# Altium PCB cereal-pcb.PcbDoc (part 2 of 2)
Units mil, origin at the board's own origin, x right, y up, seen from the top; angles counter-clockwise.
Board outline 894.17 x 955.43 mil, 4 copper layers (Top Layer, Signal Layer 1, Signal Layer 2, Bottom Layer), stack 22.048 mil thick; 42 components, 42 nets, 225 pads, 75 vias.
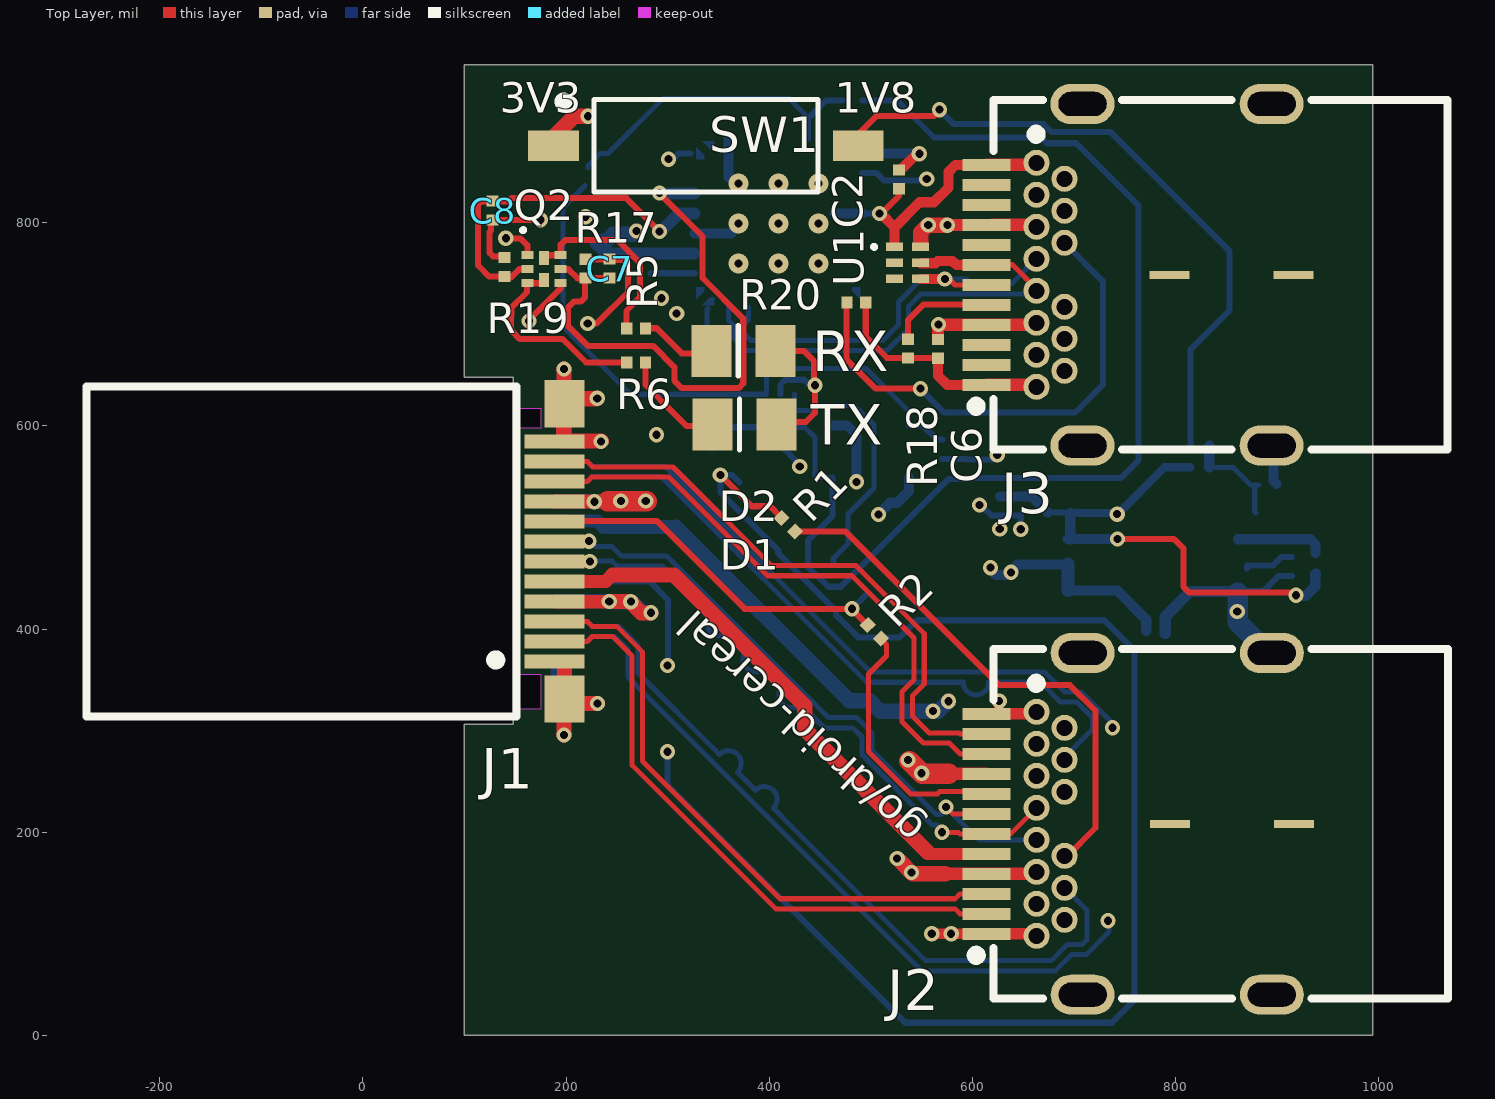
[diagram p0: Top Layer view]

## Silkscreen, mask and mechanical layers (free items; w line width, h text height) (continued)
Drill Drawing: (continued)
  text "Plated" at 1053.84,-527.08 h72
  text "Hole Type" at 1559.71,-527.08 h72
  text "Drill Layer Pair" at 2293.51,-527.08 h72
  text "Via/Pad" at 3793.06,-527.08 h72
  text "Pad Shape" at 4382.91,-527.08 h72
  text "Template" at 5128.71,-527.08 h72
  text "Description" at 6318.36,-527.08 h72
  text "Hole Tolerance (+)" at 7172.13,-527.08 h72
  text "Hole Tolerance (-)" at 8505.73,-527.08 h72
  text "Hole Length" at 9839.34,-527.08 h72
  text "Routed Path Length" at 10929.02,-527.08 h72
  text "8" at -615.69,-677.08 h60
  text "0.600mm (23.62mil)" at -45.84,-677.08 h60
  text "PTH" at 1053.84,-677.08 h60
  text "Slot" at 1559.71,-677.08 h60
  text "Top Layer - Bottom Layer" at 2293.51,-677.08 h60
  text "Pad" at 3793.06,-677.08 h60
  text "Rounded" at 4382.91,-677.08 h60
  text "r100_160h60_120r100" at 5128.71,-677.08 h60
  text "1.200mm (47.24mil)" at 9839.34,-677.08 h60
  text "0.600mm (23.62mil)" at 10929.02,-677.08 h60
  text "9" at -615.69,-827.08 h60
  text "0.200mm (7.87mil)" at -45.84,-827.08 h60
  text "PTH" at 1053.84,-827.08 h60
  text "Round" at 1559.71,-827.08 h60
  text "Top Layer - Bottom Layer" at 2293.51,-827.08 h60
  text "Via" at 3793.06,-827.08 h60
  text "Rounded" at 4382.91,-827.08 h60
  text "v50h20m60mx0" at 5128.71,-827.08 h60
  text "-" at 9839.34,-827.08 h60
  text "-" at 10929.02,-827.08 h60
  text "28" at -615.69,-977.08 h60
  text "0.400mm (15.75mil)" at -45.84,-977.08 h60
  text "PTH" at 1053.84,-977.08 h60
  text "Round" at 1559.71,-977.08 h60
  text "Top Layer - Bottom Layer" at 2293.51,-977.08 h60
  text "Pad" at 3793.06,-977.08 h60
  text "Rounded" at 4382.91,-977.08 h60
  text "c65h40" at 5128.71,-977.08 h60
  text "-" at 9839.34,-977.08 h60
  text "-" at 10929.02,-977.08 h60
  text "66" at -615.69,-1127.08 h60
  text "0.203mm (8.00mil)" at -45.84,-1127.08 h60
  text "PTH" at 1053.84,-1127.08 h60
  text "Round" at 1559.71,-1127.08 h60
  text "Top Layer - Bottom Layer" at 2293.51,-1127.08 h60
  text "Via" at 3793.06,-1127.08 h60
  text "Rounded" at 4382.91,-1127.08 h60
  text "v38h20m0mx0" at 5128.71,-1127.08 h60
  text "-" at 9839.34,-1127.08 h60
  text "-" at 10929.02,-1127.08 h60
  text "111 Total" at -615.69,-1277.08 h60
  text "Slot definitions :" at -1121.57,-1422.06 h60
  text "Routed Path Length" at -88.88,-1422.06 h60
  text "= Calculated from tool start centre position to tool end centre position." at 1013.79,-1422.06 h60
  text "Hole Length" at -88.88,-1522.03 h60
  text "= Routed Path Length + Tool Size = Slot length as defined in the PCB layout" at 603.92,-1522.03 h60